# Altium PCB PCB_Facto.PcbDoc (part 1 of 2)
Units mil, origin at the board's own origin, x right, y up, seen from the top; angles counter-clockwise.
Board outline 2860 x 2480 mil, 2 copper layers (Top Layer, Bottom Layer); 83 components, 110 nets, 404 pads, 112 vias.
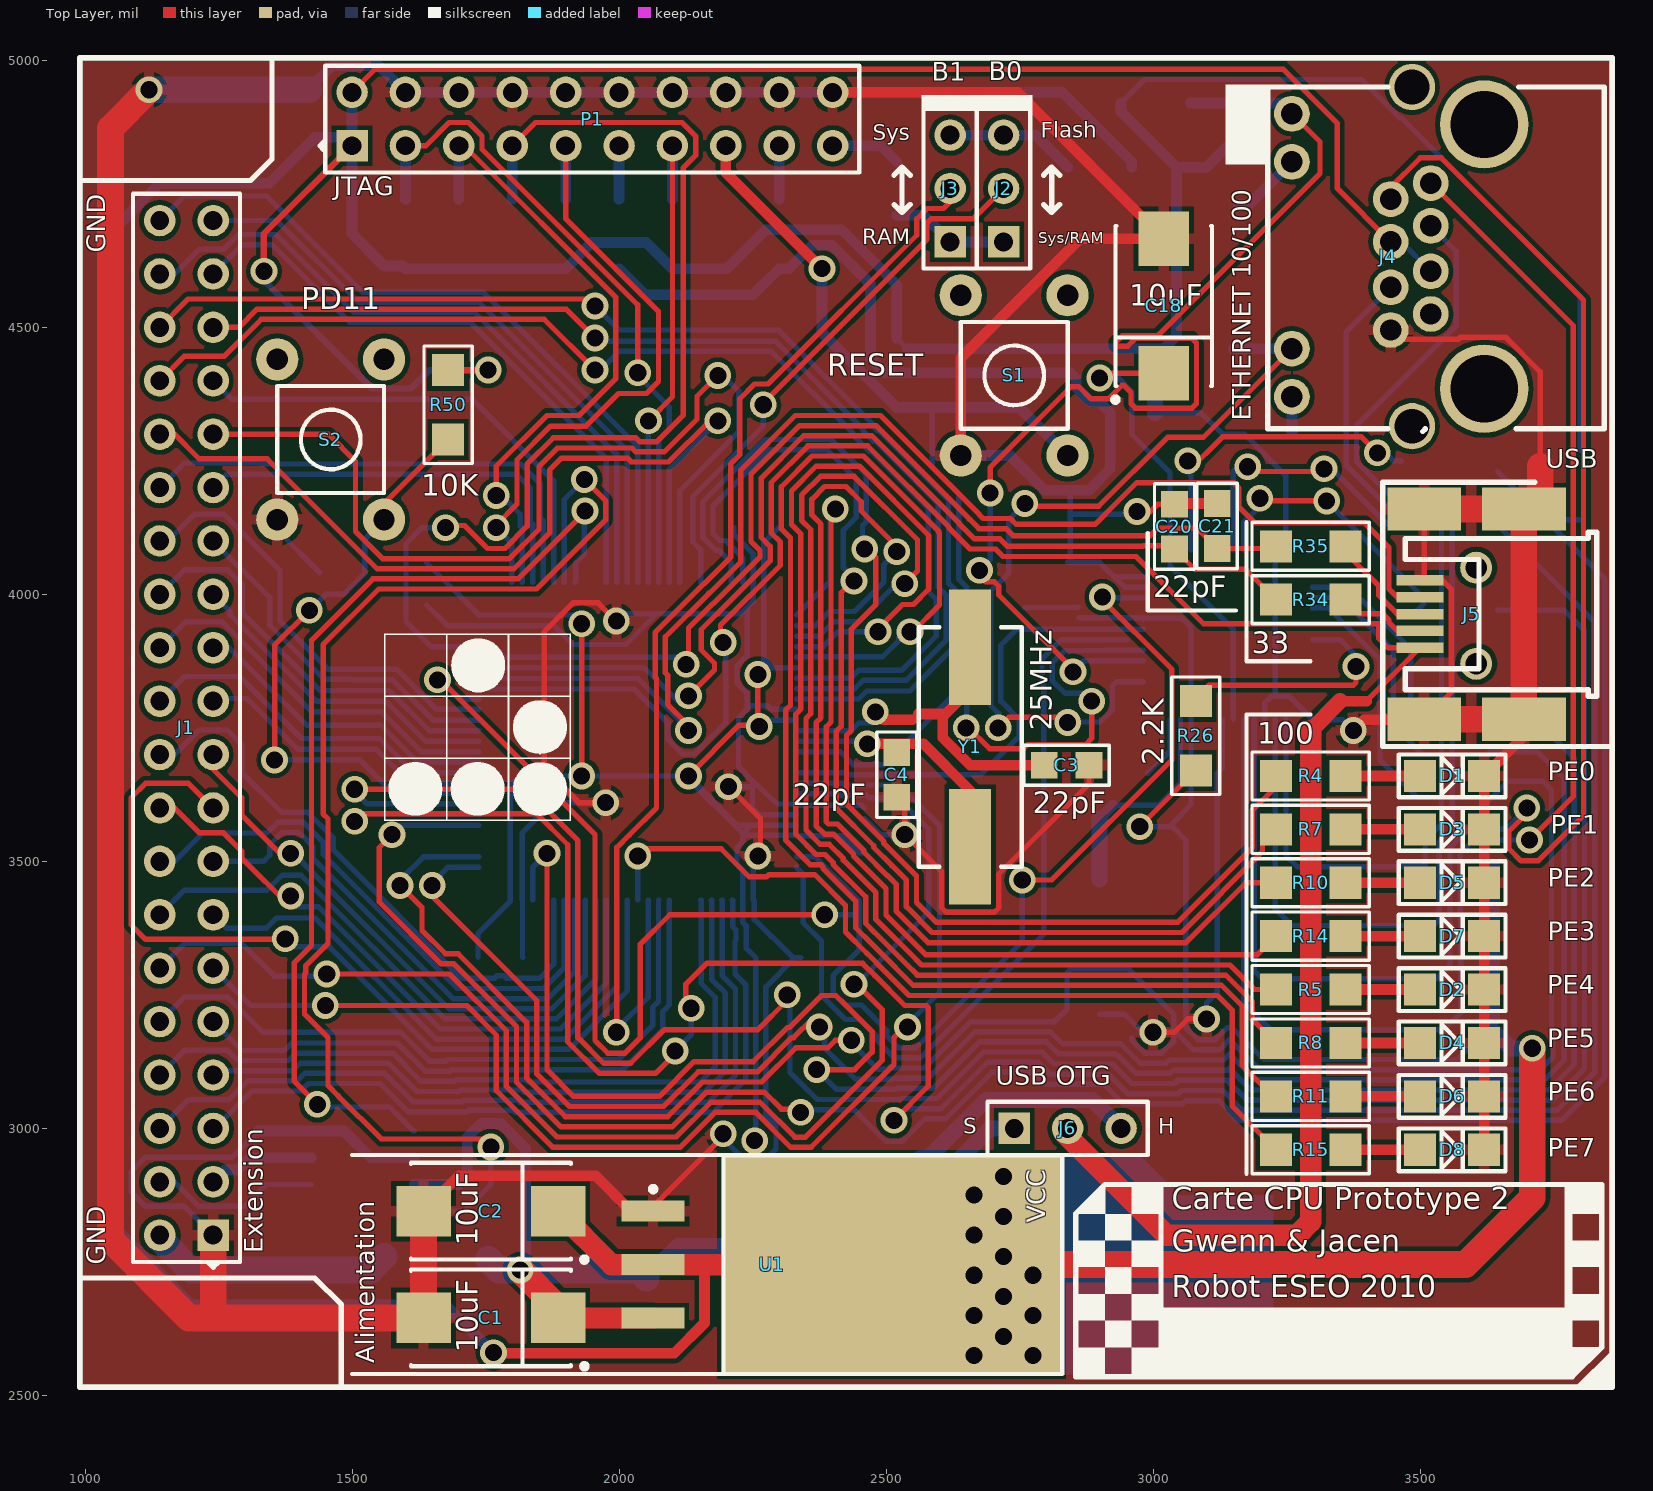
[diagram p0: Top Layer view]
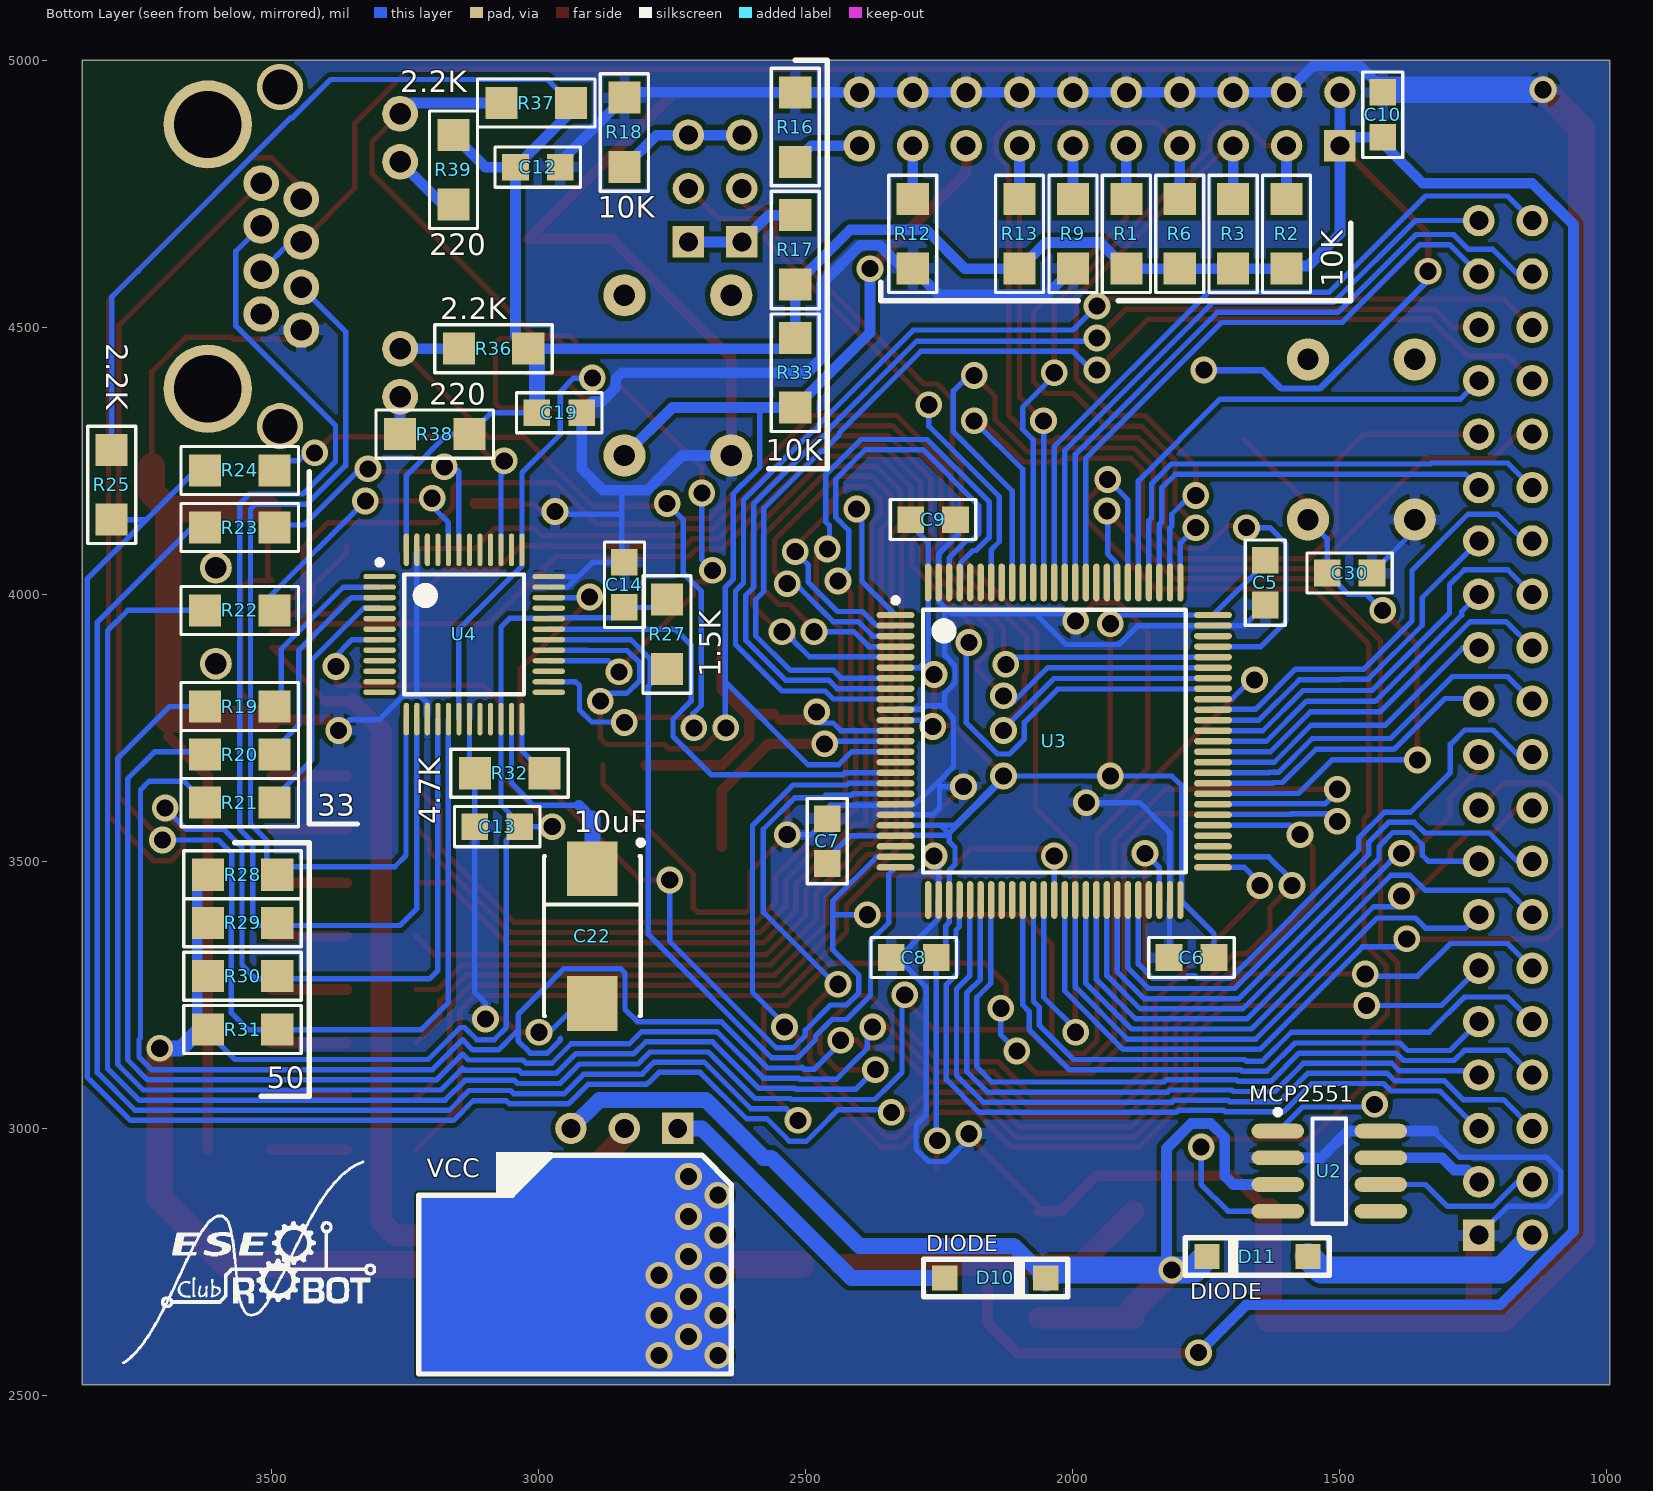
[diagram p1: Bottom Layer view, seen from below]

## Layer stack, top to bottom
Top Layer: signal copper 1.4
Dielectric: dielectric 12.6, FR-4, Dk 4.8
Bottom Layer: signal copper 1.4

## Board outline
995,5000 3855,5000 3855,2520 995,2520

## Design rules (kind name [scope] priority, off if disabled: settings)
Clearance Clearance_QFP [(InComponent('U3') OR InComponent('U4'))] p1: gap=7
Clearance [All] p2: gap=9
HoleSize [All] p1: absolutevalues=TRUE maxlimit=150 minlimit=32 maxpercent=80.000 minpercent=20.000
PlaneClearance [All] p1: clearance=40
PlaneConnect [All] p1: planeconnectstyle=Relief reliefexpansion=20 reliefentries=4 reliefconductorwidth=20 reliefairgap=10
PolygonConnect [All] p1: connectstyle=Relief reliefconductorwidth=20 reliefentries=4 polygonreliefangle="90 Angle"
RoutingVias [All] p1: holewidth=32 width=50 viastyle="Through Hole" minholewidth=32 minwidth=50 maxholewidth=40 maxwidth=50
SilkscreenOverComponentPads [All] p1: minsilkscreentomaskgap=10
SolderMaskExpansion [All] p1: expansion=4
TestPointUsage [All] p1: valid=0 allowmultiple=FALSE
Testpoint [All] p1: side=15 testpointundercomponent=TRUE minsize=40 maxsize=100 preferedsize=60 minholesize=0 maxholesize=40 preferedholesize=32 testpointgrid=1 style=1023 order=0-112345678
Width Width_POWER [(InNet('GND') OR InNet('VCC'))] p1: maxlimit=100 minlimit=10 preferedwidth=16
Width [All] p2: maxlimit=100 minlimit=8 preferedwidth=12
20 further rules are at their usual default settings.

## Components (designator, comment, footprint, x,y, rotation, side; value= is the part's Value field where it differs from the comment)
C1 "10uF" TC7343-2917 1760,2645 r180 top
C2 "10uF" TC7343-2917 1760,2845 r180 top
C3 "22pF" COND_CMS_0805 2880,3680 r180 top
C4 "22pF" COND_CMS_0805 2520,3620 r90 top
C5 "100nF" COND_CMS_0805 1640,3980 r90 bottom
C6 "100nF" COND_CMS_0805 1820,3320 r180 bottom
C7 "100nF" COND_CMS_0805 2460,3580 r270 bottom
C8 "100nF" COND_CMS_0805 2340,3320 r180 bottom
C9 "100nF" COND_CMS_0805 2220,4140 r0 bottom
C10 "100nF" COND_CMS_0805 1420,4940 r270 bottom
C12 "100nF" COND_CMS_0805 2960,4800 r0 bottom
C13 "100nF" COND_CMS_0805 3120,3565 r180 bottom
C14 "100nF" COND_CMS_0805 2840,4060 r270 bottom
C18 "10uF" TC7343-2917 3020,4540 r90 top
C19 "100nF" COND_CMS_0805 2920,4340 r0 bottom
C20 "22pF" COND_CMS_0805 3040,4085 r90 top
C21 "22pF" COND_CMS_0805 3120,4170 r270 top
C22 "10uF" TC7343-2917 2900,3360 r270 bottom
C30 "100nF" COND_CMS_0805 1440,4040 r0 bottom
D1 "LED" LED_1206 3620,3660 r90 top
D2 "LED" LED_1206 3620,3260 r90 top
D3 "LED" LED_1206 3620,3560 r90 top
D4 "LED" LED_1206 3620,3160 r90 top
D5 "LED" LED_1206 3620,3460 r90 top
D6 "LED" LED_1206 3620,3060 r90 top
D7 "LED" LED_1206 3620,3360 r90 top
D8 "LED" LED_1206 3620,2960 r90 top
D10 "DIODE" DIODE_CMS_LL4000 2240,2720 r180 bottom
D11 "DIODE" DIODE_CMS_LL4000 1560,2760 r0 bottom
J1 "Extension" HEADER20X2 1240,2800 r90 top
J2 "Jumper" HEADER3 2720,4660 r90 top
J3 "Jumper" HEADER3 2620,4660 r90 top
J4 "ETHERNET 10/100" "RJ45_8/8 W/ LEDS" 3320,4760 r0 top
J5 "USB" MINI_USB_B 3500,3900 r90 top
J6 "Jumper" HEADER3 2740,3000 r0 top
P1 "JTAG" HEADER10X2 1500,4840 r0 top
R1 "10K" RES_CMS_1206 1900,4740 r270 bottom
R2 "10K" RES_CMS_1206 1600,4740 r270 bottom
R3 "10K" RES_CMS_1206 1700,4740 r270 bottom
R4 "100" RES_CMS_1206 3360,3660 r180 top
R5 "100" RES_CMS_1206 3360,3260 r180 top
R6 "10K" RES_CMS_1206 1800,4740 r270 bottom
R7 "100" RES_CMS_1206 3360,3560 r180 top
R8 "100" RES_CMS_1206 3360,3160 r180 top
R9 "10K" RES_CMS_1206 2000,4740 r270 bottom
R10 "100" RES_CMS_1206 3360,3460 r180 top
R11 "100" RES_CMS_1206 3360,3060 r180 top
R12 "10K" RES_CMS_1206 2300,4610 r90 bottom
R13 "10K" RES_CMS_1206 2100,4610 r90 bottom
R14 "100" RES_CMS_1206 3360,3360 r180 top
R15 "100" RES_CMS_1206 3360,2960 r180 top
R16 "10K" RES_CMS_1206 2520,4940 r270 bottom
R17 "10K" RES_CMS_1206 2520,4580 r90 bottom
R18 "10K" RES_CMS_1206 2840,4800 r90 bottom
R19 "33" RES_CMS_1206 3625,3790 r180 bottom
R20 "33" RES_CMS_1206 3625,3700 r180 bottom
R21 "33" RES_CMS_1206 3625,3610 r180 bottom
R22 "33" RES_CMS_1206 3625,3970 r180 bottom
R23 "33" RES_CMS_1206 3625,4125 r180 bottom
R24 "33" RES_CMS_1206 3625,4232 r180 bottom
R25 "2.2K" RES_CMS_1206 3800,4140 r90 bottom
R26 "2.2K" RES_CMS_1206 3080,3800 r270 top
R27 "1.5K" RES_CMS_1206 2760,3860 r90 bottom
R28 "50" RES_CMS_1206 3490,3475 r0 bottom
R29 "50" RES_CMS_1206 3490,3385 r0 bottom
R30 "50" RES_CMS_1206 3620,3285 r180 bottom
R31 "50" RES_CMS_1206 3490,3185 r0 bottom
R32 "4.7K" RES_CMS_1206 3120,3665 r180 bottom
R33 "10K" RES_CMS_1206 2520,4480 r270 bottom
R34 "33" RES_CMS_1206 3360,3990 r180 top
R35 "33" RES_CMS_1206 3360,4090 r180 top
R36 "2.2K" RES_CMS_1206 3020,4460 r0 bottom
R37 "2.2K" RES_CMS_1206 2940,4920 r0 bottom
R38 "220" RES_CMS_1206 3260,4300 r180 bottom
R39 "220" RES_CMS_1206 3160,4860 r270 bottom
R50 "10K" RES_CMS_1206 1680,4420 r270 top
S1 "RESET" TOUCHE_KSA 2640,4260 r0 top
S2 "PD11" TOUCHE_KSA 1360,4140 r0 top
U1 "LM1086IS-3.3" TO-263 2300,2745 r0 top
U2 "A82C250/MCP2551" SOIC8 1520,2920 r180 bottom
U3 "STM32F107VBT6" LQFP100_N 2035,3725 r180 bottom
U4 "DP83848CVV" LQFP48 3140,3925 r180 bottom
Y1 "25MHz" QUARTZ_CMS 2640,3840 r270 top

## Footprints (in the part's own frame and the unit in brackets; to place one, negate y for a bottom-side part, rotate by r counter-clockwise, add the part's x,y. Pads: shape width x height; smd on the part's side, far side on the other; paste and mask are expansions set on the pad)
COND_CMS_0805 [mil] "Capacitor; CMS 0805; 2mmx1.25mm"
  rect 50x50 smd: 1(0,0) 2(84,0)
  silkscreen extent -38,-38 122,38, body extent 1,-24 79,25, height 31
DIODE_CMS_LL4000 [mm] "Power Diode, MELF package"
  rect 1.2x1.2 smd: 1(0,0) 2(4.8,0)
  silkscreen extent -1.02,-0.89 5.84,0.89, body extent 0.66,-0.64 4.16,0.81, height 1.32
HEADER3 [mm] "Connector; Header; 3 Position"
  rect 1.5x1.5 hole 0.9: 1(0,0)
  round 1.5 hole 0.9: 2(2.54,0) 3(5.08,0)
  silkscreen extent -1.27,-1.27 6.35,1.27, body extent -1.27,-1.27 6.35,1.27, height 10.1
HEADER10X2 [mm] "Connector; Header; 10x2 Position"
  rect 1.5x1.5 hole 0.9: 1(0,0)
  round 1.5 hole 0.9: 2(0,2.54) 3(2.54,0) 4(2.54,2.54) 5(5.08,0) 6(5.08,2.54) 7(7.62,0) 8(7.62,2.54) 9(10.16,0) 10(10.16,2.54) 11(12.7,0) 12(12.7,2.54) 13(15.24,0) 14(15.24,2.54) 15(17.78,0) 16(17.78,2.54) 17(20.32,0) 18(20.32,2.54) 19(22.86,0) 20(22.86,2.54)
  silkscreen extent -1.52,-1.27 24.13,3.81, body extent -1.27,-1.27 24.13,3.81, height 10.1
HEADER20X2 [mm] "Connector; Header; 20x2 Position"
  rect 1.5x1.5 hole 0.9: 1(0,0)
  round 1.5 hole 0.9: 2(0,2.54) 3(2.54,0) 4(2.54,2.54) 5(5.08,0) 6(5.08,2.54) 7(7.62,0) 8(7.62,2.54) 9(10.16,0) 10(10.16,2.54) 11(12.7,0) 12(12.7,2.54) 13(15.24,0) 14(15.24,2.54) 15(17.78,0) 16(17.78,2.54) 17(20.32,0) 18(20.32,2.54) 19(22.86,0) 20(22.86,2.54) 21(25.4,0) 22(25.4,2.54) 23(27.94,0) 24(27.94,2.54) 25(30.48,0) 26(30.48,2.54) 27(33.02,0) 28(33.02,2.54) 29(35.56,0) 30(35.56,2.54) 31(38.1,0) 32(38.1,2.54) 33(40.64,0) 34(40.64,2.54) 35(43.18,0) 36(43.18,2.54) 37(45.72,0) 38(45.72,2.54) 39(48.26,0) 40(48.26,2.54)
  silkscreen extent -1.52,-1.27 49.53,3.81, body extent -1.4,-1.27 49.4,3.81, height 10.1
LED_1206 [mil] "3.2 x 1.6 mm SMD CHIP LED LAMP"
  rect 60x60 smd: A(0,120) C(0,0)
  silkscreen extent -40,-40 40,160, body extent -27,-5 30,125, height 54
LQFP48 [mm] "Thin QFP, 48-Leads, Body 7x7mm, Pitch 0.5mm, IPC High Density"
  oval 1.55x0.25 smd: 1(-4.025,2.75) 2(-4.025,2.25) 3(-4.025,1.75) 4(-4.025,1.25) 5(-4.025,0.75) 6(-4.025,0.25) 7(-4.025,-0.25) 8(-4.025,-0.75) 9(-4.025,-1.25) 10(-4.025,-1.75) 11(-4.025,-2.25) 12(-4.025,-2.75) 25(4.025,-2.75) 26(4.025,-2.25) 27(4.025,-1.75) 28(4.025,-1.25) 29(4.025,-0.75) 30(4.025,-0.25) 31(4.025,0.25) 32(4.025,0.75) 33(4.025,1.25) 34(4.025,1.75) 35(4.025,2.25) 36(4.025,2.75)
  oval 0.25x1.55 smd: 13(-2.75,-4.025) 14(-2.25,-4.025) 15(-1.75,-4.025) 16(-1.25,-4.025) 17(-0.75,-4.025) 18(-0.25,-4.025) 19(0.25,-4.025) 20(0.75,-4.025) 21(1.25,-4.025) 22(1.75,-4.025) 23(2.25,-4.025) 24(2.75,-4.025) 37(2.75,4.025) 38(2.25,4.025) 39(1.75,4.025) 40(1.25,4.025) 41(0.75,4.025) 42(0.25,4.025) 43(-0.25,4.025) 44(-0.75,4.025) 45(-1.25,4.025) 46(-1.75,4.025) 47(-2.25,4.025) 48(-2.75,4.025)
  silkscreen extent -4.15,-2.85 2.85,3.55, body extent -4.45,-4.45 4.56,4.56, height 1.6
LQFP100_N [mm] "Thin QFP, 100-Leads, Body 14x14mm, Pitch 0.5mm, IPC Medium Density"
  oval 1.8x0.3 smd: 1(-7.55,6) 2(-7.55,5.5) 3(-7.55,5) 4(-7.55,4.5) 5(-7.55,4) 6(-7.55,3.5) 7(-7.55,3) 8(-7.55,2.5) 9(-7.55,2) 10(-7.55,1.5) 11(-7.55,1) 12(-7.55,0.5) 13(-7.55,0) 14(-7.55,-0.5) 15(-7.55,-1) 16(-7.55,-1.5) 17(-7.55,-2) 18(-7.55,-2.5) 19(-7.55,-3) 20(-7.55,-3.5) 21(-7.55,-4) 22(-7.55,-4.5) 23(-7.55,-5) 24(-7.55,-5.5) 25(-7.55,-6) 51(7.55,-6) 52(7.55,-5.5) 53(7.55,-5) 54(7.55,-4.5) 55(7.55,-4) 56(7.55,-3.5) 57(7.55,-3) 58(7.55,-2.5) 59(7.55,-2) 60(7.55,-1.5) 61(7.55,-1) 62(7.55,-0.5) 63(7.55,0) 64(7.55,0.5) 65(7.55,1) 66(7.55,1.5) 67(7.55,2) 68(7.55,2.5) 69(7.55,3) 70(7.55,3.5) 71(7.55,4) 72(7.55,4.5) 73(7.55,5) 74(7.55,5.5) 75(7.55,6)
  oval 0.3x1.8 smd: 26(-6,-7.55) 27(-5.5,-7.55) 28(-5,-7.55) 29(-4.5,-7.55) 30(-4,-7.55) 31(-3.5,-7.55) 32(-3,-7.55) 33(-2.5,-7.55) 34(-2,-7.55) 35(-1.5,-7.55) 36(-1,-7.55) 37(-0.5,-7.55) 38(0,-7.55) 39(0.5,-7.55) 40(1,-7.55) 41(1.5,-7.55) 42(2,-7.55) 43(2.5,-7.55) 44(3,-7.55) 45(3.5,-7.55) 46(4,-7.55) 47(4.5,-7.55) 48(5,-7.55) 49(5.5,-7.55) 50(6,-7.55) 76(6,7.55) 77(5.5,7.55) 78(5,7.55) 79(4.5,7.55) 80(4,7.55) 81(3.5,7.55) 82(3,7.55) 83(2.5,7.55) 84(2,7.55) 85(1.5,7.55) 86(1,7.55) 87(0.5,7.55) 88(0,7.55) 89(-0.5,7.55) 90(-1,7.55) 91(-1.5,7.55) 92(-2,7.55) 93(-2.5,7.55) 94(-3,7.55) 95(-3.5,7.55) 96(-4,7.55) 97(-4.5,7.55) 98(-5,7.55) 99(-5.5,7.55) 100(-6,7.55)
  silkscreen extent -7.68,-6.25 6.25,6.82, body extent -8,-8 8,8, height 1.6
MINI_USB_B [mm] "Connector; USB; Type B; miniature; Pin Spacing=0.8mm"
  rect 0.5x2.25 smd: 1(0,0) 2(0.8,0) 3(1.6,0) 4(2.4,0) 5(3.2,0)
  rect 2.05x3.5 smd: 6(6.6,-0.2) 9(-3.4,-0.2)
  rect 2.05x4 smd: 7(6.6,-4.935) 8(-3.4,-4.935)
  round 1.524 hole 1.016: 10(3.81,-2.667) 11(-0.762,-2.667)
  silkscreen extent -2.3,-8.4 5.5,0.7, body extent -3.7,-8.51 7,0.69, height 3.95
QUARTZ_CMS [mil] "HC49/4HSMX CRYSTALS; 11.4mm x 4.9mm; Pin spacing=9.5mm"
  rect 216.53x78.73 smd: 1(-61.2,17.6) 2(312.8,17.6)
  silkscreen extent -98,-79 350,114, body extent -170,-70 421,107, height 99
RES_CMS_1206 [mil] "Resistor; CMS 1206; 3.2mmx1.6mm"
  rect 60x60 smd: 1(0,0) 2(130,0)
  silkscreen extent -45,-45 175,45, body extent 2,-30 128,33, height 39
"RJ45_8/8 W/ LEDS" [mm] "Connector; RJ45; 8P/8C; Low Profil; Right Angle; Pin Spacing=2.54mm"
  round 1.7 hole 1.016: 1(5.08,0.254) 2(3.175,-0.508) 3(5.08,-1.778) 4(3.175,-2.54) 5(5.08,-3.937) 6(3.175,-4.699) 7(5.08,-5.969) 8(3.175,-6.731) 9(-1.524,3.556) 10(-1.524,1.27) 11(-1.524,-7.62) 12(-1.524,-9.906)
  round 4.2 hole 3.2: FIX1(7.62,3.048) FIX2(7.62,-9.525)
  round 2.2 hole 1.651: FIX3(4.191,4.826) FIX4(4.191,-11.303)
  silkscreen extent -2.67,-11.56 13.33,4.83, body extent -2.79,-11.66 13.46,5.05, height 14.75
SOIC8 [mm] "8-Pin Small Outline Integrated Circuit 1.27 mm Pitch, IPC Low Density"
  oval 2.5x0.7 smd: 1(-2.45,1.905) 2(-2.45,0.635) 3(-2.45,-0.635) 4(-2.45,-1.905) 5(2.45,-1.905) 6(2.45,-0.635) 7(2.45,0.635) 8(2.45,1.905)
  silkscreen extent -2.58,-2.5 0.8,2.93, body extent -4.32,-2.67 4.07,2.71, height 2.2
TC7343-2917 [mm] "Capacitor, SM Tantalum; Body 7.3 x 4.3 mm (LxW typ)"
  rect 2.6x2.4 smd: 1(-3.2,0) 2(3.2,0)
  silkscreen extent -4.58,-2.3 3.8,2.42, body extent -3.7,-2.13 3.6,2.17, height 2.2
TO-263 [mm] "D2-PAK, 4-Leads, Body 8.6x10.2mm, Pitch 2.54mm, Lead Span 14.2mm, IPC High Density"
  rect 3x1 smd: 1(-6,2.54) 2(-6,0) 3(-6,-2.54)
  rect 16.16x10.45 smd: 4(5.334,0)
  silkscreen extent -6.12,-5.21 13.46,5.2, body extent -7.11,-5 8.56,5, height 4.68
TOUCHE_KSA [mil] "Switch; Push Button; mounted Pcb; Pin Spacing=7.62mm/5.08mm"
  round 79 hole 40: 1(0,0) 2(200,0) 3(200,300) 4(0,300)
  silkscreen extent 0,50 200,250, body extent -20,0 224,312, height 157

## Part data
C1 C2 C18 C22: library part "Cap Pol3", "Polarized Capacitor (Surface Mount)"
C3 C4 C5 C6: library part CONDENSATEUR, "Capacitor"
C7 C8 C9 C10 C12 C13 C14 C19 C20 C21 C30: library part "Cap Semi", "Capacitor (Semiconductor SIM Model)"
D1 D2 D3 D4 D5 D6 D7 D8: "Typical RED, GREEN, YELLOW, AMBER GaAs LED"
D10 D11: "Default Diode"
J1: library part CONNECTEUR_HE10_40
J2 J3 J6: library part BARRETTE3, "Header, 3-Pin"
J4: library part RJ45_8/8, "Right Angle, Standard Profile, RJ45-Keyed, Flange Mount PCB Jack"
J5: library part USB_Mini, "USB 1.1, Right Angle, SMT, A Type, Receptacle, 4 Position, White"
P1: library part "Header 10X2", "Header, 10-Pin, Dual row"
R1 R2 R3 R6 R9 R12 R13 R16 R17 R18 R33 R50: library part "Res Semi", "Semiconductor Resistor"
R4 R5 R7 R8 R10 R11 R14 R15 R19 R20 R21 R22 R23 R24 R25 R26 R27 R28 R29 R30 R31 R32 R34 R35 R36 R37 R38 R39: library part RESISTANCE, "Resistor"
S1 S2: library part "BOUTON POUSSOIR", "Switch"
U1: "1.5A Low Dropout Positive Regulators"
U2: library part MCP2551, "High Speed Can Transceiver"
U3: library part STM32F103VBT6, "STM32 ARM-based 32-bit MCU with 64 Kbytes Flash, 100-pin LQFP, Industrial Temperature"
U4: "PHYTER® Commercial Temperature Single Port 10/100 Mb/s Ethernet Physical Layer Transceiver"
Y1: library part QUARTZ, "Crystal Oscillator"

## Via types
v1: diameter 50, hole 32, Top Layer to Bottom Layer, 111 vias
v2: diameter 50/50 (per signal layer), hole 32, Top Layer to Bottom Layer, 1 vias

## Nets (pads, with @x,y where several pads share a name; then routed paths per layer and width w, separated by ;. In a path a pad name is that pad's centre, name@x,y a point inside that pad or via, vN(x,y) a via of type N, cw(c..) or ccw(c..) an arc to the next point about the centre after c; other vN are vias at no path point)
5V: C1.1 D10.2 D11.2 J6.3 U1.3 U2.3 | length 2172.7
  Top Layer w40: C1.1@1885.98,2645 U1.3@2063.78,2645
  Top Layer w50: v1(1815,2735) C1.1@1885.98,2664.02
  Bottom Layer w20: U2.3@1616.46,2895 1700,2895 1716,2911 1716,2983.23 1741.77,3009 1778.23,3009 1825,2962.23 v1@1825,2745
  Bottom Layer w30: D10.2@2051.02,2720 2111.02,2780 2400,2780 2565,2945 2579.26,2945 2687.78,3053.53 2886.47,3053.53 J6.3@2940,3000
  Bottom Layer w50: D11.2@1755,2755 1775,2735 v1(1815,2735) 2036.02,2735 D10.2@2051.02,2720
AN4: J1.5 U3.29 | length 1430.4
  Bottom Layer w10: J1.5@1240,3000 1242.37,3000 1312.37,3070 1404.85,3070 1418.85,3084 1552.89,3084 1605.89,3031 1714.83,3031 1717.83,3034 1802.17,3034 1806.17,3030 2175.72,3030 2237,3091.28 2237,3269.2 2217,3289.2 2217,3350.8 2219,3352.8 2219,3371.39 2212.85,3377.54 2212.85,3427.07 U3.29@2212.17,3427.76
AN5: J1.6 U3.30 | length 1505.5
  Bottom Layer w10: J1.6@1140,3000 1193.91,3053.91 1269.41,3053.91 1304.5,3089 1396.98,3089 1410.98,3103 1560.76,3103 1613.76,3050 1706.96,3050 1709.96,3053 1810.04,3053 1814.04,3049 2167.85,3049 2218,3099.15 2218,3261.33 2193.17,3286.17 2193.17,3427.07 U3.30@2192.48,3427.76
AN6: J1.7 U3.31 | length 1340.7
  Bottom Layer w10: J1.7@1240,3100 1248,3108 1389.11,3108 1403.11,3122 1568.63,3122 1621.63,3069 1699.09,3069 1702.09,3072 1817.91,3072 1821.91,3068 2159.98,3068 2199,3107.02 2199,3253.46 2173.48,3278.98 2173.48,3427.07 U3.31@2172.8,3427.76
AN7: J1.8 U3.32 | length 1433.2
  Bottom Layer w10: J1.8@1140,3100 1186.09,3146.09 1267.04,3146.09 1286.13,3127 1381.24,3127 1395.24,3141 1576.5,3141 1629.5,3088 1691.22,3088 1694.22,3091 1825.78,3091 1829.78,3087 2152.11,3087 2180,3114.89 2180,3245.59 2153.8,3271.8 2153.8,3427.07 U3.32@2153.11,3427.76
AN8: J1.9 U3.35 | length 1172.2
  Bottom Layer w10: J1.9@1240,3200 1294,3146 1373.37,3146 1387.37,3160 1584.37,3160 1637.37,3107 1683.35,3107 1686.35,3110 2007.02,3110 2082,3184.98 2082,3219.02 2094.06,3231.08 U3.35@2094.06,3427.76
AN9: J1.10 U3.36 | length 1259.1
  Bottom Layer w10: J1.10@1140,3200 1186.09,3246.09 1267.04,3246.09 1333.13,3180 1591.24,3180 1645.24,3126 1675.48,3126 1678.48,3129 1999.15,3129 2063,3192.85 2063,3226.89 2074,3237.89 2074,3427.39 U3.36@2074.37,3427.76
AN12: J1.11 U3.17 | length 2378.9
  Top Layer w10: v1(1450,3230) 1715,3230 1770,3175 1770,3070.65 1875.65,2965 2114.85,2965 2179.85,3030 2256.11,3030 2321.4,2964.71 2359.71,2964.71 2515,3120 2515,3170 2540,3195 v1(2540,3190)
  Bottom Layer w10: J1.11@1240,3300 1310,3230 v1(1450,3230) ; U3.17@2332.24,3646.26 2419.85,3646.26 2423.11,3643 2524.02,3643 2600,3567.02 2600,3255 v1@2541.5,3196.5
AN13: J1.12 U3.18 | length 2499
  Top Layer w10: v1(1452.59,3289) 1682.87,3289 1789,3182.87 1789,3078.52 1883.52,2984 2106.98,2984 2171.98,3049 2263.98,3049 2329.27,2983.71 2348.86,2983.71 2493,3127.85 2493,3222 2445,3270 v1(2440,3270)
  Bottom Layer w10: J1.12@1140,3300 1186.09,3346.09 1293.37,3346.09 1354.46,3285 1450,3285 1450,3290 1451,3289 v1(1452.59,3289) ; U3.18@2332.24,3626.57 2412.66,3626.57 2415.24,3624 2462.87,3624 2467.87,3619 2521.15,3619 2580,3560.15 2580,3405 2443,3268 2442,3268 v1(2440,3270)
GND: C1.2 C2.2 C3.1 C4.1 C5.1 C6.1 C7.1 C8.1 C9.1 C10.1 C12.1 C13.1 C14.1 C18.2 C19.1 C20.2 C21.1 C22.2 C30.1 D1.C D2.C D3.C D4.C D5.C D6.C D7.C D8.C J1.1 J4.8 J5.5 J5.6 J5.7 J5.8 J5.9 P1.4 P1.6 P1.8 P1.10 P1.12 P1.14 P1.16 P1.18 P1.20 R9.2 R12.1 R16.1 R18.2 R32.1 S1.1 S2.1 U1.1 U2.2 U2.8 U3.10 U3.19 U3.20 U3.27 U3.49 U3.74 U3.99 U4.15 U4.19 U4.35 U4.36 U4.47 | length 19028.4
  Top Layer w10: v1(1975,3610) 1924.85,3610 1860,3674.85 1860,3930.15 1913.85,3984 1961,3984 v1(1995,3950) ; U1.1@2063.78,2853.78 2195,2985 v1(2195,2990) ; v1(2205,3640) 2265,3580 2265,3515 v1(2260,3510) ; C4.1@2535,3620 v1(2535,3550) 2604.23,3480.77 2604.23,3413.13 2612.43,3404.93 2702.77,3404.93 2710.97,3413.13 2710.97,3476.12 2880,3645.15 C3.1@2880,3680 ; v1(2970,4155) 2995,4155 3009,4169 C20.2@3040,4169 C20.2@3041,4170 ; v1(3000,3180) 3040,3180 3065,3205 v1(3100,3205) ; J4.8@3445,4495 3462.46,4477.54 3571.67,4477.54 3575.81,4481.68 3660.05,4481.68 3725,4416.72 3725,4240 ; J5.9@3506.73,3765 J5.9@3507.87,3766.14 3558.29,3816.56 3558.29,4010.13 3542.44,4025.98 J5.5@3500,4025.98 3507.87,4033.86 J5.6@3507.87,4159.84 ; J5.8@3694.29,3734.29 J5.8@3694.29,3766.14
  Top Layer w20: C2.2@1634.02,2845 1700.26,2911.24 1956.17,2911.24 2022.41,2845 U1.1@2063.78,2845 ; P1.20@2400,4940 2745.98,4940 C18.2@3020,4665.98 2863.25,4665.98 2640,4442.73 S1.1@2640,4260 ; C20.2@3041,4170 C21.1@3120,4170 ; v1(3375,3745) 3395,3765 J5.9@3506.73,3765 ; D8.C@3620,2960 D6.C@3620,3060 D4.C@3620,3160 D2.C@3620,3260 D7.C@3620,3360 D5.C@3620,3460 D3.C@3620,3560 D1.C@3620,3660 J5.8@3694.29,3734.29
  Top Layer w50: v1(1120,4945) 1047.63,4872.63 1047.63,2791.63 1194.26,2645 1240,2645 ; J1.1@1240,2800 1240,2645 ; C2.2@1634.02,2845 C1.2@1634.02,2645 1240,2645 ; J5.9@3507.87,3766.14 J5.8@3694.29,3766.14 J5.7@3694.29,4159.84 ; J5.6@3507.87,4159.84 J5.7@3694.29,4159.84 ; 3725,4240 3725,4190.55 J5.7@3694.29,4159.84
  Bottom Layer w10: J1.1@1240,2800 1186.09,2853.91 1113.63,2853.91 1086.63,2880.91 1086.63,2919.09 1113.63,2946.09 1276.09,2946.09 1325,2995 ; S2.1@1360,4140 1360,4120 C30.1@1440,4040 ; C10.1@1400,4940 C10.1@1412.94,4940 ; C5.1@1640,3980 1678.46,3941.54 U3.74@1737.76,3941.54 1878.31,3941.54 1913.85,3906 2012.56,3906 2070.55,3964 ; C6.1@1820,3320 1819.15,3320.85 1819.15,3427.07 U3.49@1818.46,3427.76 1818.46,3553.46 1875,3610 v1(1975,3610) ; v1(1995,3950) 2009,3964 2070.55,3964 ; v1(2195,2990) 2195,2980.8 2237.85,2937.95 2270.15,2937.95 2294,2961.8 2294,3006.15 2275,3025.15 2275,3265.15 2329.85,3320 C8.1@2340,3320 2325.8,3320 2286.8,3359 2285.13,3359 2253.31,3390.81 2253.31,3425.98 U3.27@2251.54,3427.76 2251.54,3496.54 2260,3505 v1(2260,3510) ; v1(2205,3640) 2245,3640 ; C9.1@2215,4125 2215,4111.87 2251.54,4075.33 U3.99@2251.54,4022.24 ; U3.20@2316.76,3587.2 U3.20@2332.24,3587.2 2262.8,3587.2 2250,3600 2250,3650.9 ; U3.10@2332.24,3784.06 2331.56,3784.74 2285.41,3784.74 2278.73,3791.42 2246.42,3791.42 2240,3785 ; C7.1@2460,3580 2490,3550 v1(2535,3550) ; C7.1@2460,3600 2455,3605 2334.13,3605 U3.19@2332.24,3606.89 2331.56,3607.57 2296.39,3607.57 2250,3650.9 ; C14.1@2840,4060 C14.1@2845,4060 ; 2845,4195 2845,4150 ; C22.2@2900,3214.02 2945.98,3214.02 2980,3180 v1(3000,3180) ; 2928.27,4033.27 U4.36@2981.54,4033.27 ; v1(2970,4155) 2965,4150 2845,4150 ; U4.35@2981.54,4013.58 2946.42,4013.58 2900,4060 C14.1@2845,4060 ; v1(3100,3205) 3100,3235 3120,3255 C13.1@3120,3565 R32.1@3120,3665 3130.16,3675.16 U4.19@3130.16,3766.54 ; U4.15@3208.9,3766.54 3208.9,3796.37 3221.57,3809.05 3230,3809.05 ; U4.47@3228.58,4083.46 3228.58,3810.47 3230,3809.05 ; v1(3375,3745) 3355,3765 3299.32,3765 3255.28,3809.05 3230,3809.05 ; 2070.55,3964 2228.46,3964 2240,3975.54 ; 2240,3785 2223.58,3768.58 2223.58,3677.32 2250,3650.9 ; 2240,3785 2240,3814.85 2221,3833.85 2221,3866.15 2240,3885.15 2240,3975.54 ; 2240,3975.54 2250.85,3986.39 ; 2250.85,3986.39 2251.54,3987.08 U3.99@2251.54,4022.24 ; 2250.85,3986.39 2250.85,4021.56 U3.99@2251.54,4022.24 ; C14.1@2845,4060 2845,4150
  Bottom Layer w20: 1325,2995 U2.8@1423.54,2995 1485,2995 1535,2945 U2.2@1616.46,2945 ; C10.1@1412.94,4940 1462.94,4990 1550,4990 P1.4@1600,4940 P1.6@1700,4940 P1.8@1800,4940 P1.10@1900,4940 P1.12@2000,4940 P1.14@2100,4940 P1.16@2200,4940 P1.18@2300,4940 P1.20@2400,4940 R16.1@2520,4940 2830,4940 R18.2@2840,4930 2960,4810 C12.1@2960,4800 ; R9.2@2000,4610 2049,4561 2251,4561 R12.1@2300,4610 2317.77,4610 2361.77,4654 2398.23,4654 2471,4581.23 2471,4442.13 2498.13,4415 2845,4415 2856,4404 2856,4386.77 2881.77,4361 2899,4361 C19.1@2920,4340 2920,4235 2880,4195 2845,4195 2797.23,4195 2732.23,4260 S1.1@2640,4260
  Bottom Layer w50: v1(1120,4945) C10.1@1420,4945
NetC3_2: C3.2 U3.12 Y1.1 | length 717.6
  Top Layer w10: 2549,3765 2560,3776
  Top Layer w20: v1(2480,3780) 2495,3765 2549,3765 ; 2560,3776 2610,3776 ; Y1.1@2657.6,3901.2 2657.6,3822.6 2606,3771 2606,3731.77 2657.77,3680 C3.2@2800,3680
  Bottom Layer w10: U3.12@2332.24,3744.68 2434.53,3744.69 2448.85,3759 2473,3759 2480,3766 v1(2480,3780)
NetC4_2: C4.2 U3.13 Y1.2 | length 473.1
  Top Layer w20: v1(2465,3720) 2470,3715 2475,3715 2480,3720 2570,3720 2657.6,3632.4 Y1.2@2657.6,3527.2
  Bottom Layer w10: U3.13@2332.24,3725 2460,3725 v1(2465,3720)
NetC18_1: C18.1 U4.18 U4.37 | length 886.2
  Top Layer w10: v1(2900,4405) 2909.02,4414.02 C18.1@3020,4414.02
  Bottom Layer w10: v1(2900,4405) 2935,4405 2960,4380 2960,4299.85 3031.73,4228.11 3031.73,4053.27 3149.84,3935.16 U4.18@3149.84,3766.54
NetC20_1: C20.1 R34.2 U3.70 | length 2046.6
  Top Layer w10: v1(2130,3810) 2130.15,3810 2178.85,3858.69 2178.85,3871 2154,3895.85 2154,3934.15 2183.85,3964 2184.61,3964 2283,4062.39 2283,4090 2266,4107 2266,4217.26 2345.74,4297 2473.6,4297 2636.95,4133.65 2636.95,4133.05 2666,4104 2713.02,4104 2727.02,4090 2981.13,4090 2982.13,4091 3034,4091 C20.1@3040,4085 3078,4047 3173,4047 R34.2@3230,3990
  Bottom Layer w10: U3.70@1737.76,3862.8 2047.2,3862.8 2110,3800 2120,3800 v1(2130,3810)
NetC21_2: C21.2 R35.2 U3.71 | length 1978.5
  Top Layer w10: v1@2130,3865 2130,3937.02 2175.98,3983 2176.74,3983 2264,4070.26 2264,4082.13 2247,4099.13 2247,4225.13 2337.87,4316 2481.47,4316 2655.95,4141.52 2655.95,4140.92 2673.87,4123 2724.98,4123 2737.98,4110 2995.2,4110 3009.2,4124 3082,4124 C21.2@3120,4086 3226,4086 R35.2@3230,4090
  Bottom Layer w10: U3.71@1737.76,3882.48 1795,3882.48 ; 1822.52,3882.48 1795,3882.48 ; v1(2125.69,3869) 2125.69,3877.31 2120.52,3882.48 1795,3882.48
NetC22_1: C22.1 U4.23 | length 412.9
  Bottom Layer w10: 2925,3605 3009.8,3605 3051.42,3646.62 U4.23@3051.42,3766.54
  Bottom Layer w20: 2900,3580 2925,3605
  Bottom Layer w30: C22.1@2900,3465.98 2900,3580
NetC30_2: C30.2 R50.2 S2.2 U3.58 | length 1163.6
  Top Layer w10: v1(1355,3690) 1355,3905 v1(1420,3970) ; S2.2@1560,4140 1560,4170 R50.2@1680,4290
  Bottom Layer w10: v1(1355,3690) 1515.04,3690 1577.78,3627.26 1737.07,3627.26 U3.58@1737.76,3626.57 ; v1(1420,3970) 1450,4000 1484,4000 C30.2@1524,4040 1524,4104 S2.2@1560,4140
NetD1_1: D1.A R4.1 | length 140
  Top Layer w20: R4.1@3360,3660 D1.A@3500,3660
NetD2_1: D2.A R5.1 | length 140
  Top Layer w20: R5.1@3360,3260 D2.A@3500,3260
NetD3_1: D3.A R7.1 | length 140
  Top Layer w20: R7.1@3360,3560 D3.A@3500,3560
NetD4_1: D4.A R8.1 | length 140
  Top Layer w20: R8.1@3360,3160 D4.A@3500,3160
NetD5_1: D5.A R10.1 | length 140
  Top Layer w20: R10.1@3360,3460 D5.A@3500,3460
NetD6_1: D6.A R11.1 | length 140
  Top Layer w20: R11.1@3360,3060 D6.A@3500,3060
NetD7_1: D7.A R14.1 | length 140
  Top Layer w20: R14.1@3360,3360 D7.A@3500,3360
NetD8_1: D8.A R15.1 | length 140
  Top Layer w20: R15.1@3360,2960 D8.A@3500,2960
NetD10_1: D10.1 J6.1 | length 596
  Bottom Layer w30: D10.1@2240,2720 2415,2720 2695,3000 J6.1@2720,3000
NetD11_1: D11.1 J1.2 | length 461.5
  Bottom Layer w50: J1.2@1140,2800 1140,2792.86 1197.86,2735 1535,2735 D11.1@1560,2760
NetJ1_3: J1.3 U2.7 | length 202.2
  Bottom Layer w20: J1.3@1240,2900 1262.09,2922.09 1286.03,2922.09 1308.94,2945 U2.7@1423.54,2945
NetJ1_4: J1.4 U2.6 | length 319.7
  Bottom Layer w10: J1.4@1140,2900 1167.54,2900 1213.63,2853.91 1298.91,2853.91 1340,2895 U2.6@1423.54,2895
NetJ1_29: J1.29 U3.78 | length 793.7
  Bottom Layer w10: J1.29@1240,4200 1265,4225 1808.15,4225 1834,4199.15 1834,4135.24 1838.15,4131.09 U3.78@1838.15,4022.24
NetJ1_30: J1.30 U3.79 | length 935
  Bottom Layer w10: J1.30@1140,4200 1186.09,4246.09 1327.91,4246.09 1330,4244 1816.02,4244 1853,4207.02 1853,4143.11 1857.83,4138.27 U3.79@1857.83,4022.24
NetJ1_31: J1.31 U3.92 | length 1819.9
  Top Layer w10: J1.31@1240,4300 1455.66,4300 1506.5,4249.16 1506.5,4117.84 1557.34,4067 1795,4067 1850,4122 1850,4239.39 1884.61,4274 2023.98,4274 2030.98,4267 2085.13,4267 2146,4327.87 2146,4371 v1(2185,4410)
  Bottom Layer w10: U3.92@2113.74,4022.24 2113.74,4193.74 2224,4304 2224,4381 2190,4415 v1(2185,4410)
NetJ1_32: J1.32 U3.91 | length 1679.2
  Top Layer w10: J1.32@1140,4300 1167.54,4300 1213.63,4253.91 1341.09,4253.91 1547,4048 1803,4048 1870,4115 1870,4232.52 1892.48,4255 2016.11,4255 2023.11,4248 2093,4248 2170,4325 v1(2185,4325)
  Bottom Layer w10: U3.91@2094.06,4022.24 2094.06,4234.06 v1(2185,4325)
NetJ2_1: J2.1 J3.1 R17.2 | length 220.7
  Bottom Layer w20: R17.2@2520,4710 2570,4710 J3.1@2620,4660 J2.1@2720,4660
NetJ2_2: J2.2 U3.94 | length 1034.5
  Top Layer w10: v1(2270,4355) 2267.71,4355 2267.71,4355.84 2576.47,4664.6 2576.47,4695.33 2584.67,4703.53 2663.53,4703.53 J2.2@2720,4760
  Bottom Layer w10: U3.94@2153.11,4022.24 2153.11,4083.35 2138,4098.46 2138,4183 2270,4315 v1(2270,4355)
NetJ2_3: J2.3 J3.3 R18.1 | length 244.9
  Bottom Layer w20: J3.3@2620,4860 J2.3@2720,4860 2780,4860 R18.1@2840,4800
NetJ3_2: J3.2 U3.37 | length 2146.5
  Top Layer w10: v1(1995,3180) 1996,3181 1996,3526.15 2018.85,3549 2019,3549 2070,3600 2070,3842.67 2067.69,3844.98 2067.69,3928.46 2160.24,4021 2161,4021 2209,4069 2209,4244 2226,4261 2226,4366.15 2253.85,4394 2279,4394 2557.47,4672.47 2557.47,4703.2 2576.8,4722.53 2607.53,4722.53 2620,4735 J3.2@2620,4760
  Bottom Layer w10: v1(1995,3180) 1995,3185.76 2054.69,3245.45 U3.37@2054.68,3427.76
NetJ4_1: J4.1 R31.1 U4.17 | length 2780.3
  Top Layer w10: J4.1@3520,4770 3787.03,4502.97 3787.03,3622.03 v1(3705,3540)
  Bottom Layer w10: U4.17@3169.53,3766.54 3169.53,3710.47 ; 3170,3710 3169.53,3710.47 ; v1@3699,3540 3600,3540 3575,3515 3575,3390.2 3576,3389.2 3576,3216 3545,3185 R31.1@3490,3185 3220,3185 3169.53,3235.47 3169.53,3710.47
NetJ4_2: J4.2 R30.2 U4.16 | length 2983.9
  Top Layer w10: J4.2@3445,4762.12 3500.34,4817.46 3539.66,4817.46 3806.03,4551.09 3806.03,3585.88 3721.15,3501 3688.85,3501 3666,3523.85 3666,3556.15 3700,3590.15 v1(3700,3600)
  Bottom Layer w10: U4.16@3189.21,3766.54 3189.21,3295.79 3205,3280 3530,3280 3556,3306 3556,3526 3590,3560 3660,3560 v1(3700,3600)
NetJ4_3: J4.3 R29.1 U4.14 | length 2218.8
  Bottom Layer w10: U4.14@3228.58,3766.54 3228.58,3411.42 3260,3380 3525,3380 3536,3391 3536,3536 3560,3560 3560,4170 3542,4188 3441.85,4188 3381,4248.85 3381,4316 3567.46,4502.46 3567.46,4642.54 J4.3@3520,4690
NetJ4_6: J4.6 R28.1 U4.13 | length 1787.9
  Bottom Layer w10: U4.13@3248.27,3766.54 3249,3765.8 3249,3511 3270,3490 3510,3490 3510,3540 3540,3570 3540,4160 3531,4169 3433.98,4169 3362,4240.98 3362,4492 J4.6@3445,4575
NetJ4_9: J4.9 R37.2 U4.28 | length 2223
  Top Layer w10: v1(2675,4045) 2675,4035 2686.53,4023.47 2702.77,4023.47 2710.97,4015.27 2710.97,3999.03 2836.7,3873.3 v1@2854.76,3873.3 ; v1@2695,4214.31 2695,4237.23 2846.62,4388.85 2861,4388.85 2883.85,4366 2916.15,4366 2942.28,4392.13 2944.77,4392.13 2958.76,4378.15 2958.76,4357.04 2966.96,4348.83 3073.04,4348.83 3081.24,4357.04 3081.24,4471 3073.04,4479.2 2966.96,4479.2 2952.39,4464.63 2932.67,4464.63 2930.53,4466.77 2930.53,4472.76 2941.97,4484.2 3008.39,4484.2 3312.46,4788.27 3312.46,4847.54 J4.9@3260,4900
  Top Layer w20: v1(2850,3855) v1@2850,3860
  Bottom Layer w10: v1@2670,4040 2695,4065 2695,4075 v1(2695,4190) ; v1(2850,3855) 2870.79,3875.79 U4.28@2981.54,3875.79
  Bottom Layer w20: R37.2@3070,4920 3240,4920 J4.9@3260,4900
NetJ4_10: J4.10 R39.2 | length 133.1
  Bottom Layer w20: R39.2@3160,4730 3180,4730 J4.10@3260,4810
NetJ4_11: J4.11 R36.2 U4.26 | length 1550.3
  Top Layer w10: v1(2710,3750) 2730,3770 2850,3770 v1(2840,3760) ; v1(2760,4170) 2765,4165 2897.98,4165 3026.98,4294 3094,4294 J4.11@3260,4460
  Bottom Layer w10: v1@2712,3752 2712,3776.28 2696,3792.28 2696,4006 2730,4040 2730,4140 v1(2760,4170) ; v1(2840,3760) 2841,3761 2901.15,3761 2924,3783.85 2924,3829 2931.42,3836.42 U4.26@2981.54,3836.42
  Bottom Layer w20: v1(2710,3750) v1@2712,3752 ; R36.2@3150,4460 J4.11@3260,4460
NetJ4_12: J4.12 R38.1 | length 70
  Bottom Layer w20: R38.1@3260,4300 J4.12@3260,4370